# EAGLE board byteworker_nutzen (EAGLE 6.5.0), part 1 of 2
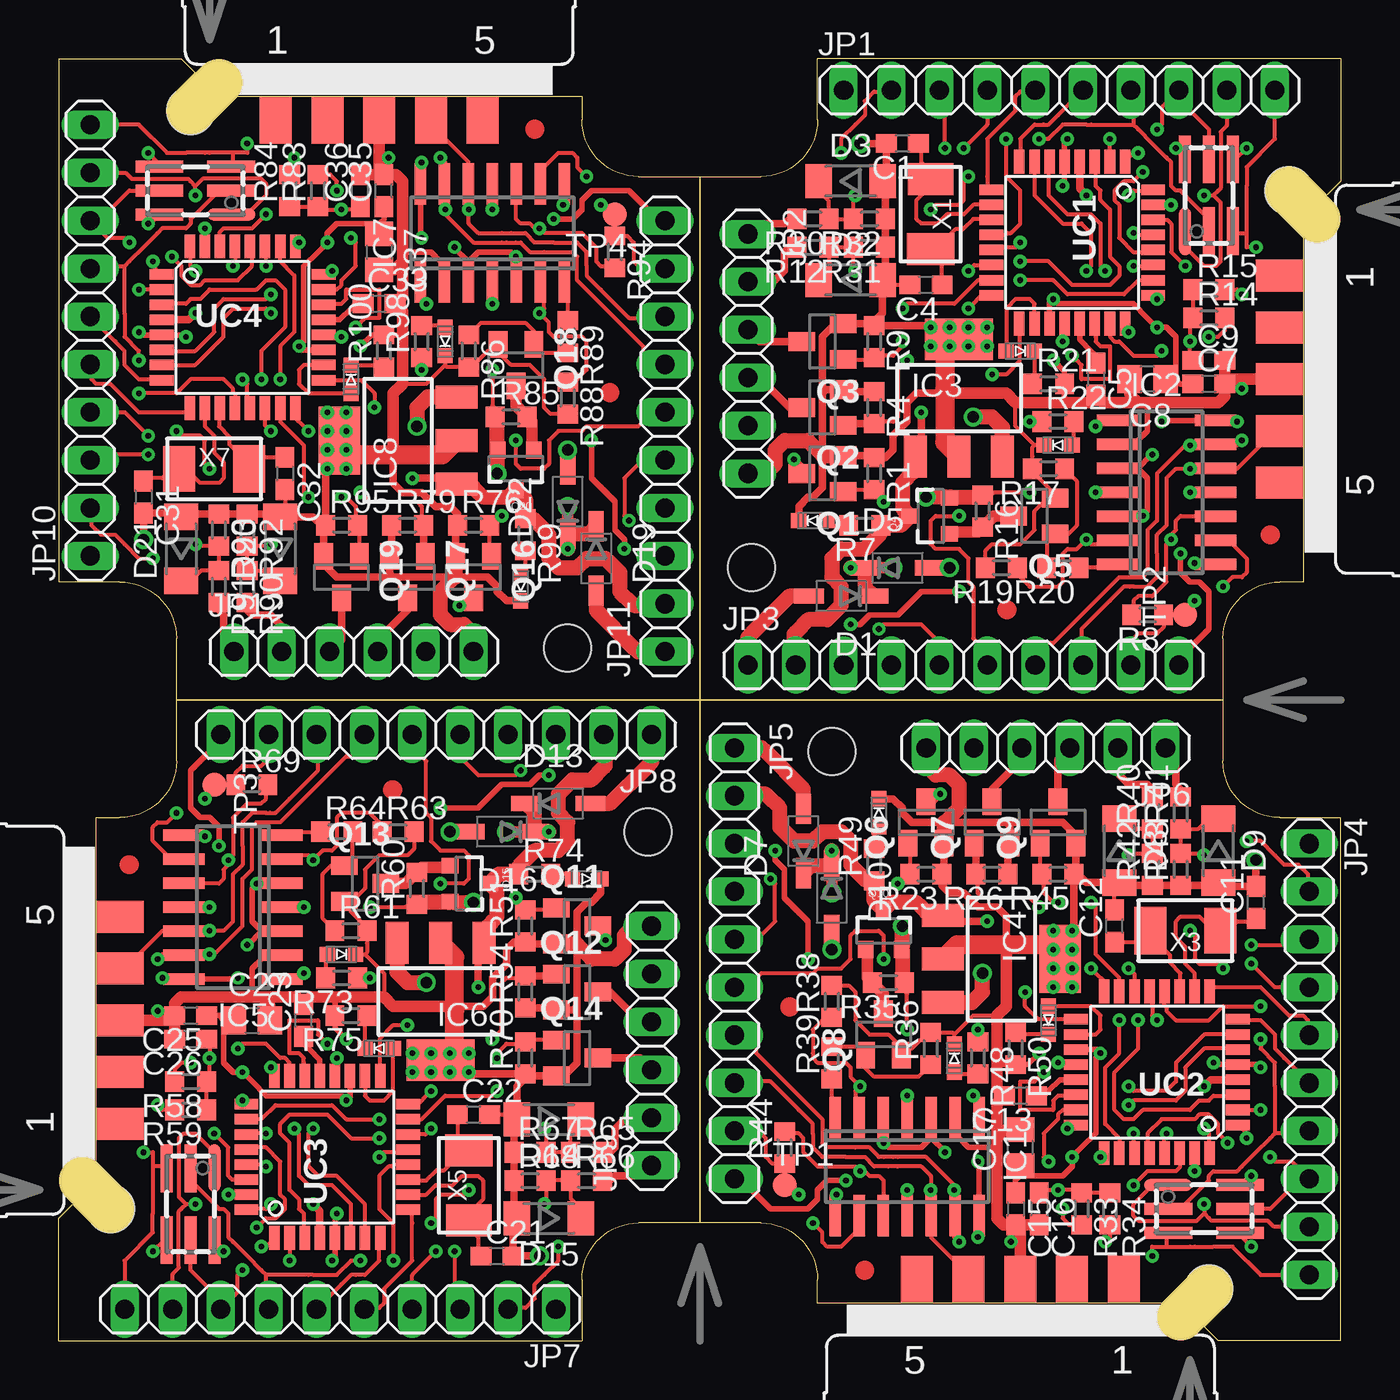
[diagram p0: board, top side]
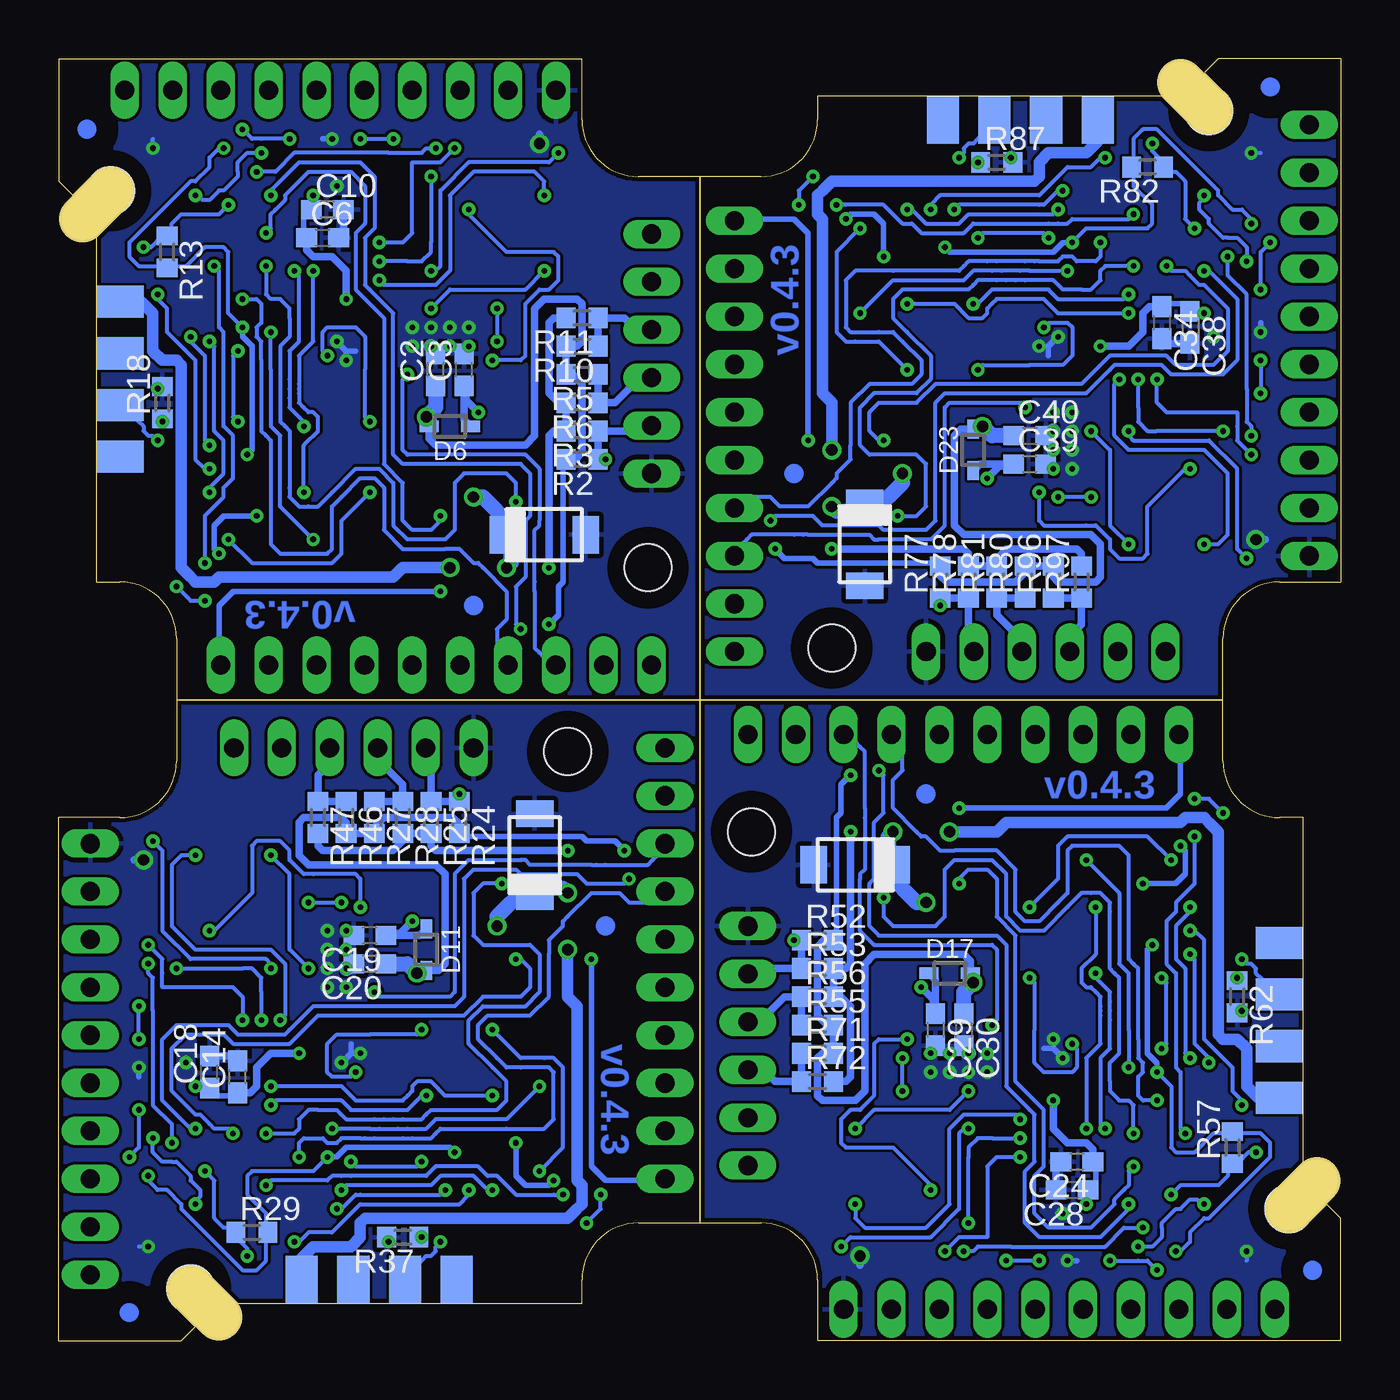
[diagram p1: board, bottom side, seen from below]

Size 68 x 68 mm. Coordinates in mm from the lower left corner, seen from the top.
Outline: 34,34 34,61.75
Outline: 61.75,34 34,34
Outline: 61.75,34 61.75,37.25 arc-90 64.75,40.25 66,40.25 66,58.5 64.25,60.25 66,62 67.25,60.75 68,61.5 68,68 40.25,68 40.25,64.75 arc-90 37.25,61.75 34,61.75
Outline: 34,34 61.75,34
Outline: 34,6.25 34,34
Outline: 34,6.25 37.25,6.25 arc-90 40.25,3.25 40.25,2 58.5,2 60.25,3.75 62,2 60.75,0.75 61.5,0 68,0 68,27.75 64.75,27.75 arc-90 61.75,30.75 61.75,34
Outline: 34,34 34,6.25
Outline: 6.25,34 34,34
Outline: 6.25,34 6.25,30.75 arc-90 3.25,27.75 2,27.75 2,9.5 3.75,7.75 2,6 0.75,7.25 0,6.5 0,0 27.75,0 27.75,3.25 arc-90 30.75,6.25 34,6.25
Outline: 34,34 6.25,34
Outline: 34,61.75 34,34
Outline: 34,61.75 30.75,61.75 arc-90 27.75,64.75 27.75,66 9.5,66 7.75,64.25 6,66 7.25,67.25 6.5,68 0,68 0,40.25 3.25,40.25 arc-90 6.25,37.25 6.25,34
Copper layers (1*16): Top 0.035mm / dielectric 1.5mm / Bottom 0.035mm
Design rules "pro-2layer-cheap": minimum track width 0.15mm, minimum drill 0.3mm, track to track 0.15mm, track to pad 0.15mm, pad to pad 0.15mm, via to via 0.15mm, smd to smd 0mil, copper to edge 0.25mm, drill to drill 0.5mm, minimum pad ring 10mil, minimum via ring 8mil, stop-mask expansion 4mil, vias tented up to drill 0.3mm, thermal gap 10mil
Holes 2.5 mm at 65.25,61 36.75,41 61,2.75 41,31.25 2.75,7 31.25,27 7,65.25 27,36.75
tRestrict: area 34.8,39 to 38.8,43; area 63.2,59 to 67.2,63; area 39,29.2 to 43,33.2; area 59,0.8 to 63,4.8; area 29.2,25 to 33.2,29; area 0.8,5 to 4.8,9; area 25,34.8 to 29,38.8; area 5,63.2 to 9,67.2
bRestrict: area 34.8,39 to 38.8,43; area 63.2,59 to 67.2,63; area 39,29.2 to 43,33.2; area 59,0.8 to 63,4.8; area 29.2,25 to 33.2,29; area 0.8,5 to 4.8,9; area 25,34.8 to 29,38.8; area 5,63.2 to 9,67.2
Milling: 4 lines

## Footprints (pad centres in the part's own frame; a part is rotated, then mirrored left to right if it is on the bottom)
C0603 = smd 1.1 x 1: 1 -0.85,0; 2 0.85,0
C0805 = smd 1.3 x 1.5: 1 -0.95,0; 2 0.95,0
SOD123 = smd 1.6 x 0.8: A 1.7,0; C -1.7,0
SOD80 = smd 1.4 x 1.8: A 1.7,0; C -1.7,0
SOD-128 = smd 2 x 1.4: A 0,-2.2; C 0,2.2
SOD323 = smd 1 x 0.6: A 1.1,0; C -1.1,0
SO14 = smd 0.6 x 2.2: 1 -3.81,-2.6; 2 -2.54,-2.6; 3 -1.27,-2.6; 4 0,-2.6; 5 1.27,-2.6; 6 2.54,-2.6; 7 3.81,-2.6; 8 3.81,2.6; 9 2.54,2.6; 10 1.27,2.6; 11 0,2.6; 12 -1.27,2.6; 13 -2.54,2.6; 14 -3.81,2.6
SOT223 = smd 1.219 x 2.235: 1 -2.311,-3.099; 2 0,-3.099; 3 2.311,-3.099 | smd 3.6 x 2.2: 4 0,3.099
2X3-1.27 = smd 0.635 x 2.54: 1 -1.27,-1.905; 2 -1.27,1.905; 3 0,-1.905; 4 0,1.905; 5 1.27,-1.905; 6 1.27,1.905
1X10 = drill 1.016 long: 1 -11.43,0; 2 -8.89,0; 3 -6.35,0; 4 -3.81,0; 5 -1.27,0; 6 1.27,0; 7 3.81,0; 8 6.35,0; 9 8.89,0; 10 11.43,0
1X06 = drill 1.016 long: 1 -6.35,0; 2 -3.81,0; 3 -1.27,0; 4 1.27,0; 5 3.81,0; 6 6.35,0
LED0603 = smd 0.8 x 0.8: A -0.75,0; C 0.75,0
SOT23C = smd 1 x 1.4: 1 -0.95,-1.1; 2 0.95,-1.1; 3 0,1.1
SOT23-3 = smd 0.8 x 0.9: 1 -0.95,-1; 2 0.95,-1; 3 0,1.1
R0603 = smd 1 x 1.1: 1 -0.85,0; 2 0.85,0
B1,27 = smd 1.27 x 1.27: TP 0,0
TQFP32-08 = smd 1.27 x 0.559: 1 -4.293,2.8; 2 -4.293,2; 3 -4.293,1.2; 4 -4.293,0.4; 5 -4.293,-0.4; 6 -4.293,-1.2; 7 -4.293,-2; 8 -4.293,-2.8; 17 4.293,-2.8; 18 4.293,-2; 19 4.293,-1.2; 20 4.293,-0.4; 21 4.293,0.4; 22 4.293,1.2; 23 4.293,2; 24 4.293,2.8 | smd 0.559 x 1.27: 9 -2.8,-4.293; 10 -2,-4.293; 11 -1.2,-4.293; 12 -0.4,-4.293; 13 0.4,-4.293; 14 1.2,-4.293; 15 2,-4.293; 16 2.8,-4.293; 25 2.8,4.293; 26 2,4.293; 27 1.2,4.293; 28 0.4,4.293; 29 -0.4,4.293; 30 -1.2,4.293; 31 -2,4.293; 32 -2.8,4.293
5.0X3.2 = smd 1.7 x 2.4: 1 -1.85,0 | smd 1.7 x 2.5: 2 1.85,0
SUBD9 = smd 1.7 x 2.5: 1 -5.486,-5.5; 2 -2.743,-5.5; 3 0,-5.5; 4 2.743,-5.5; 5 5.486,-5.5 | smd 1.7 x 2.5 bottom: 6 -4.115,-5.5; 7 -1.372,-5.5; 8 1.372,-5.5; 9 4.115,-5.5

## Placement (x,y rotation side)
C1  18p  [C0603]  44.75,63.5 180 top
C2  100n  [C0603]  48,51.5 90 bottom
C3  330n  [C0603]  46.5,51.5 90 bottom
C4  18p  [C0603]  46,56 180 top
C5  100n  [C0603]  55,51 270 top
C6  100n  [C0603]  54,58.5 0 bottom
C7  100n  [C0603]  61,50.75 0 top
C8  2u2  [C0805]  57.75,51 180 top
C9  n.b.[100n]  [C0603]  61,52 0 top
C10  100n  [C0603]  53.75,60 0 bottom
C11  18p  [C0603]  63.5,23.25 90 top
C12  18p  [C0603]  56,22 90 top
C13  100n  [C0603]  51,13 180 top
C14  100n  [C0603]  58.5,14 90 bottom
C15  100n  [C0603]  50.75,7 270 top
C16  n.b.[100n]  [C0603]  52,7 270 top
C17  2u2  [C0805]  51,10.25 90 top
C18  100n  [C0603]  60,14.25 90 bottom
C19  330n  [C0603]  51.5,21.5 180 bottom
C20  100n  [C0603]  51.5,20 180 bottom
C21  18p  [C0603]  23.25,4.5 0 top
C22  18p  [C0603]  22,12 0 top
C23  100n  [C0603]  13,17 90 top
C24  100n  [C0603]  14,9.5 180 bottom
C25  100n  [C0603]  7,17.25 180 top
C26  n.b.[100n]  [C0603]  7,16 180 top
C27  2u2  [C0805]  10.25,17 0 top
C28  100n  [C0603]  14.25,8 180 bottom
C29  330n  [C0603]  21.5,16.5 270 bottom
C30  100n  [C0603]  20,16.5 270 bottom
C31  18p  [C0603]  4.5,44.75 270 top
C32  18p  [C0603]  12,46 270 top
C33  100n  [C0603]  17,55 0 top
C34  100n  [C0603]  9.5,54 270 bottom
C35  100n  [C0603]  17.25,61 90 top
C36  n.b.[100n]  [C0603]  16,61 90 top
C37  2u2  [C0805]  17,57.75 270 top
C38  100n  [C0603]  8,53.75 270 bottom
C39  330n  [C0603]  16.5,46.5 0 bottom
C40  100n  [C0603]  16.5,48 0 bottom
D1  1N5819HW  [SOD123]  41.5,39.5 180 top
D2  4v7  [SOD80]  42,56.25 0 top
D3  4v7  [SOD80]  42,61.5 0 top
D4  16V  [SOD-128]  42.25,42.75 90 bottom
D5  1N5819HW  [SOD123]  44.5,41 0 top
D6  SCHOTTKY323  [SOD323]  47.25,48.5 180 bottom
D7  1N5819HW  [SOD123]  39.5,26.5 90 top
D8  4v7  [SOD80]  56.25,26 270 top
D9  4v7  [SOD80]  61.5,26 270 top
D10  1N5819HW  [SOD123]  41,23.5 270 top
D11  SCHOTTKY323  [SOD323]  48.5,20.75 270 bottom
D12  16V  [SOD-128]  42.75,25.75 180 bottom
D13  1N5819HW  [SOD123]  26.5,28.5 0 top
D14  4v7  [SOD80]  26,11.75 180 top
D15  4v7  [SOD80]  26,6.5 180 top
D16  1N5819HW  [SOD123]  23.5,27 180 top
D17  SCHOTTKY323  [SOD323]  20.75,19.5 0 bottom
D18  16V  [SOD-128]  25.75,25.25 270 bottom
D19  1N5819HW  [SOD123]  28.5,41.5 270 top
D20  4v7  [SOD80]  11.75,42 90 top
D21  4v7  [SOD80]  6.5,42 90 top
D22  1N5819HW  [SOD123]  27,44.5 90 top
D23  SCHOTTKY323  [SOD323]  19.5,47.25 90 bottom
D24  16V  [SOD-128]  25.25,42.25 0 bottom
E$1  [MILL-MARKER]  69,60 0 top
E$2  [MILL-MARKER]  60,-1 270 top
E$3  [MILL-MARKER]  -1,8 180 top
E$4  [MILL-MARKER]  8,69 90 top
E$5  [SCRATCH-MARKER]  63,34 0 top
E$6  [SCRATCH-MARKER]  34,5 270 top
IC1  TJA1043  [SO14]  45,9.25 180 top
IC2  TJA1043  [SO14]  58.75,45 270 top
IC3  UA78M05IDCY  [SOT223]  47.75,50 0 top
IC4  UA78M05IDCY  [SOT223]  50,20.25 270 top
IC5  TJA1043  [SO14]  9.25,23 90 top
IC6  UA78M05IDCY  [SOT223]  20.25,18 180 top
IC7  TJA1043  [SO14]  23,58.75 0 top
IC8  UA78M05IDCY  [SOT223]  18,47.75 90 top
J1  AVRSPI-61.27  [2X3-1.27]  60.75,7 270 top
J2  AVRSPI-61.27  [2X3-1.27]  61,60.75 0 top
J3  AVRSPI-61.27  [2X3-1.27]  7,7.25 180 top
J4  AVRSPI-61.27  [2X3-1.27]  7.25,61 90 top
JP1  [1X10]  53.06,66.33 0 top
JP2  [1X06]  36.55,52.36 270 top
JP3  [1X10]  47.98,35.84 0 top
JP4  [1X10]  66.33,14.94 270 top
JP5  [1X10]  35.84,20.02 270 top
JP6  [1X06]  52.36,31.45 180 top
JP7  [1X10]  14.94,1.67 180 top
JP8  [1X10]  20.02,32.16 180 top
JP9  [1X06]  31.45,15.64 90 top
JP10  [1X10]  1.67,53.06 90 top
JP11  [1X10]  32.16,47.98 90 top
JP12  [1X06]  15.64,36.55 0 top
LED1  red  [LED0603]  51,52.5 0 top
LED2  blue  [LED0603]  53,47.5 180 top
LED3  red  [LED0603]  40,43.5 180 top
LED4  blue  [LED0603]  47.5,15 90 top
LED5  red  [LED0603]  43.5,28 90 top
LED6  red  [LED0603]  52.5,17 270 top
LED7  blue  [LED0603]  15,20.5 0 top
LED8  red  [LED0603]  28,24.5 0 top
LED9  red  [LED0603]  17,15.5 180 top
LED10  blue  [LED0603]  20.5,53 270 top
LED11  red  [LED0603]  24.5,40 270 top
LED12  red  [LED0603]  15.5,51 90 top
Q1  BSS138  [SOT23C]  40.5,46 90 top
Q2  BSS138  [SOT23C]  40.5,49.5 90 top
Q3  BSS138  [SOT23C]  40.5,53 90 top
Q4  AP2321GN-HF-3TR  [SOT23-3]  46.25,43.75 90 top
Q5  BSS138  [SOT23C]  51.75,43.75 90 top
Q6  BSS138  [SOT23C]  46,27.5 0 top
Q7  BSS138  [SOT23C]  49.5,27.5 0 top
Q8  BSS138  [SOT23C]  43.75,16.25 0 top
Q9  BSS138  [SOT23C]  53,27.5 0 top
Q10  AP2321GN-HF-3TR  [SOT23-3]  43.75,21.75 0 top
Q11  BSS138  [SOT23C]  27.5,22 270 top
Q12  BSS138  [SOT23C]  27.5,18.5 270 top
Q13  BSS138  [SOT23C]  16.25,24.25 270 top
Q14  BSS138  [SOT23C]  27.5,15 270 top
Q15  AP2321GN-HF-3TR  [SOT23-3]  21.75,24.25 270 top
Q16  BSS138  [SOT23C]  22,40.5 180 top
Q17  BSS138  [SOT23C]  18.5,40.5 180 top
Q18  BSS138  [SOT23C]  24.25,51.75 180 top
Q19  BSS138  [SOT23C]  15,40.5 180 top
Q20  AP2321GN-HF-3TR  [SOT23-3]  24.25,46.25 180 top
R1  10k  [R0603]  43.25,46 270 top
R2  1k  [R0603]  40.25,46.75 180 bottom
R3  dnp  [R0603]  40.25,48.25 180 bottom
R4  10k  [R0603]  43.25,49.5 270 top
R5  1k  [R0603]  40.25,51.25 180 bottom
R6  dnp  [R0603]  40.25,49.75 180 bottom
R7  1k  [R0603]  42.75,43.25 180 top
R8  10k  [R0603]  57.75,38.5 180 top
R9  10k  [R0603]  43.25,53 270 top
R10  1k  [R0603]  40.25,52.75 180 bottom
R11  dnp  [R0603]  40.25,54.25 180 bottom
R12  18k  [R0603]  40,58 180 top
R13  10k  [R0603]  62.25,57.75 270 bottom
R14  n.b.[62R]  [R0603]  61,54.25 0 top
R15  n.b.[62R]  [R0603]  61,55.75 0 top
R16  10k  [R0603]  49,44 270 top
R17  10k  [R0603]  52.5,46.25 180 top
R18  10k  [R0603]  62.5,49.75 90 bottom
R19  10k  [R0603]  50,41 180 top
R20  10k  [R0603]  53.25,41 180 top
R21  1k  [R0603]  52.5,50.75 0 top
R22  1k  [R0603]  53,48.75 0 top
R23  10k  [R0603]  46,24.75 180 top
R24  1k  [R0603]  46.75,27.75 270 bottom
R25  dnp  [R0603]  48.25,27.75 270 bottom
R26  10k  [R0603]  49.5,24.75 180 top
R27  1k  [R0603]  51.25,27.75 270 bottom
R28  dnp  [R0603]  49.75,27.75 270 bottom
R29  10k  [R0603]  57.75,5.75 0 bottom
R30  18k  [R0603]  40,59.5 180 top
R31  10k  [R0603]  43,58 180 top
R32  10k  [R0603]  43,59.5 180 top
R33  n.b.[62R]  [R0603]  54.25,7 270 top
R34  n.b.[62R]  [R0603]  55.75,7 270 top
R35  10k  [R0603]  44,19 180 top
R36  10k  [R0603]  46.25,15.5 90 top
R37  10k  [R0603]  49.75,5.5 180 bottom
R38  10k  [R0603]  41,18 90 top
R39  10k  [R0603]  41,14.75 90 top
R40  18k  [R0603]  58,28 90 top
R41  18k  [R0603]  59.5,28 90 top
R42  10k  [R0603]  58,25 90 top
R43  10k  [R0603]  59.5,25 90 top
R44  10k  [R0603]  38.5,10.25 90 top
R45  10k  [R0603]  53,24.75 180 top
R46  1k  [R0603]  52.75,27.75 270 bottom
R47  dnp  [R0603]  54.25,27.75 270 bottom
R48  1k  [R0603]  48.75,15 270 top
R49  1k  [R0603]  43.25,25.25 90 top
R50  1k  [R0603]  50.75,15.5 270 top
R51  10k  [R0603]  24.75,22 90 top
R52  1k  [R0603]  27.75,21.25 0 bottom
R53  dnp  [R0603]  27.75,19.75 0 bottom
R54  10k  [R0603]  24.75,18.5 90 top
R55  1k  [R0603]  27.75,16.75 0 bottom
R56  dnp  [R0603]  27.75,18.25 0 bottom
R57  10k  [R0603]  5.75,10.25 90 bottom
R58  n.b.[62R]  [R0603]  7,13.75 180 top
R59  n.b.[62R]  [R0603]  7,12.25 180 top
R60  10k  [R0603]  19,24 90 top
R61  10k  [R0603]  15.5,21.75 0 top
R62  10k  [R0603]  5.5,18.25 270 bottom
R63  10k  [R0603]  18,27 0 top
R64  10k  [R0603]  14.75,27 0 top
R65  18k  [R0603]  28,10 0 top
R66  18k  [R0603]  28,8.5 0 top
R67  10k  [R0603]  25,10 0 top
R68  10k  [R0603]  25,8.5 0 top
R69  10k  [R0603]  10.25,29.5 0 top
R70  10k  [R0603]  24.75,15 90 top
R71  1k  [R0603]  27.75,15.25 0 bottom
R72  dnp  [R0603]  27.75,13.75 0 bottom
R73  1k  [R0603]  15,19.25 180 top
R74  1k  [R0603]  25.25,24.75 0 top
R75  1k  [R0603]  15.5,17.25 180 top
R76  10k  [R0603]  22,43.25 0 top
R77  1k  [R0603]  21.25,40.25 90 bottom
R78  dnp  [R0603]  19.75,40.25 90 bottom
R79  10k  [R0603]  18.5,43.25 0 top
R80  1k  [R0603]  16.75,40.25 90 bottom
R81  dnp  [R0603]  18.25,40.25 90 bottom
R82  10k  [R0603]  10.25,62.25 180 bottom
R83  n.b.[62R]  [R0603]  13.75,61 90 top
R84  n.b.[62R]  [R0603]  12.25,61 90 top
R85  10k  [R0603]  24,49 0 top
R86  10k  [R0603]  21.75,52.5 270 top
R87  10k  [R0603]  18.25,62.5 0 bottom
R88  10k  [R0603]  27,50 270 top
R89  10k  [R0603]  27,53.25 270 top
R90  18k  [R0603]  10,40 270 top
R91  18k  [R0603]  8.5,40 270 top
R92  10k  [R0603]  10,43 270 top
R93  10k  [R0603]  8.5,43 270 top
R94  10k  [R0603]  29.5,57.75 270 top
R95  10k  [R0603]  15,43.25 0 top
R96  1k  [R0603]  15.25,40.25 90 bottom
R97  dnp  [R0603]  13.75,40.25 90 bottom
R98  1k  [R0603]  19.25,53 90 top
R99  1k  [R0603]  24.75,42.75 270 top
R100  1k  [R0603]  17.25,52.5 90 top
TP1  PTR1B1,27  [B1,27]  38.5,8.25 0 top
TP2  PTR1B1,27  [B1,27]  59.75,38.5 90 top
TP3  PTR1B1,27  [B1,27]  8.25,29.5 270 top
TP4  PTR1B1,27  [B1,27]  29.5,59.75 180 top
U$1  [FIDUCIAL_R]  38.77,17.71 180 top
U$2  [FIDUCIAL_R]  50.29,38.77 270 top
U$3  [FIDUCIAL_R]  39,22 180 bottom
U$4  [FIDUCIAL_R]  46,39 90 bottom
U$5  [FIDUCIAL_R]  64.25,42.75 270 top
U$6  [FIDUCIAL_R]  66.5,64.25 90 bottom
U$7  [FIDUCIAL_R]  42.75,3.75 180 top
U$8  [FIDUCIAL_R]  64.25,1.5 180 bottom
U$9  [FIDUCIAL_R]  17.71,29.23 90 top
U$10  [FIDUCIAL_R]  22,29 270 bottom
U$11  [FIDUCIAL_R]  3.75,25.25 90 top
U$12  [FIDUCIAL_R]  1.5,3.75 270 bottom
U$13  [FIDUCIAL_R]  29.23,50.29 0 top
U$14  [FIDUCIAL_R]  29,46 0 bottom
U$15  [FIDUCIAL_R]  25.25,64.25 0 top
U$16  [FIDUCIAL_R]  3.75,66.5 0 bottom
UC1  ATMEGA16M1  [TQFP32-08]  53.75,58.25 270 top
UC2  ATMEGA16M1  [TQFP32-08]  58.25,14.25 180 top
UC3  ATMEGA16M1  [TQFP32-08]  14.25,9.75 90 top
UC4  ATMEGA16M1  [TQFP32-08]  9.75,53.75 0 top
X1  16 MHz  [5.0X3.2]  46.25,59.75 270 top
X2  SUBD-M_H9  [SUBD9]  70.25,51 270 top
X3  16 MHz  [5.0X3.2]  59.75,21.75 180 top
X4  SUBD-M_H9  [SUBD9]  51,-2.25 180 top
X5  16 MHz  [5.0X3.2]  21.75,8.25 90 top
X6  SUBD-M_H9  [SUBD9]  -2.25,17 90 top
X7  16 MHz  [5.0X3.2]  8.25,46.25 0 top
X8  SUBD-M_H9  [SUBD9]  17,70.25 0 top

## Library data of the parts
C1-C40 D1-D3 D5-D11 D13-D17 D19-D23 R7 R8 R13-R22 R29 R33-R39 R44 R48-R50 R57-R64 R69 R73-R75 R82-R89 R94 R98-R100 = bytewerk-passive
D4 D12 D18 D24 = bytewerk-diode; MF: NXP; MPN: PTVS18VP1UP; OC_FARNELL: 1859877
E$1-E$6 U$1-U$16 = bytewerk-symbol
IC1 IC2 IC5 IC7 = bytewerk-network; MF: NXP; MPN: TJA1043T,118; OC_MOUSER: 771-TJA1043T118
IC3 IC4 IC6 IC8 = bytewerk-vreg; MF: TEXAS INSTRUMENTS; MPN: UA78M05IDCY; OC_FARNELL: 1494947
J1-J4 X2 X4 X6 X8 = bytewerk-con
JP1-JP12 = pinhead
LED1-LED12 = bytewerk-led
Q1-Q3 Q5-Q9 Q11-Q14 Q16-Q19 = bytewerk-fet; MF: Fairchild Semiconductor; MPN: BSS138; OC_MOUSER: 512-BSS138
Q4 Q10 Q15 Q20 = bytewerk-transistor; MF: ADVANCED POWER ELECTRONICS CORP; MPN: AP2321GN-HF-3TR; OC_FARNELL: 2319601
R1-R6 R9-R12 R23-R28 R30-R32 R40-R43 R45-R47 R51-R56 R65-R68 R70-R72 R76-R81 R90-R93 R95-R97 = bytewerk-rcl
TP1-TP4 = testpad
UC1-UC4 = bytewerk-uc
X1 X3 X5 X7 = bytewerk-crystal

## Nets
!CAN_ERR!: IC2.8 UC1.30
!CAN_ERR!1: IC1.8 UC2.30
!CAN_ERR!2: IC5.8 UC3.30
!CAN_ERR!3: IC7.8 UC4.30
!CAN_STB!: IC2.14 R18.1 UC1.23
!CAN_STB!1: IC1.14 R37.1 UC2.23
!CAN_STB!2: IC5.14 R62.1 UC3.23
!CAN_STB!3: IC7.14 R87.1 UC4.23
!RESET!: J2.5 JP1.10 R13.1 UC1.31
!RESET!1: J1.5 JP4.10 R29.1 UC2.31
!RESET!2: J3.5 JP7.10 R57.1 UC3.31
!RESET!3: J4.5 JP10.10 R82.1 UC4.31
+5V: C2.1 C6.1 C7.1 C8.1 C10.1 D6.A IC2.3 IC2.5 IC3.3 J2.2 JP3.10 R2.2 R5.2 R10.2 R13.2 UC1.4 UC1.19
+5V1: C14.1 C15.1 C17.1 C18.1 C20.1 D11.A IC1.3 IC1.5 IC4.3 J1.2 JP5.10 R24.2 R27.2 R29.2 R46.2 UC2.4 UC2.19
+5V2: C24.1 C25.1 C27.1 C28.1 C30.1 D17.A IC5.3 IC5.5 IC6.3 J3.2 JP8.10 R52.2 R55.2 R57.2 R71.2 UC3.4 UC3.19
+5V3: C34.1 C35.1 C37.1 C38.1 C40.1 D23.A IC7.3 IC7.5 IC8.3 J4.2 JP11.10 R77.2 R80.2 R82.2 R96.2 UC4.4 UC4.19
AREF: C5.1 UC1.21
AREF1: C13.1 UC2.21
AREF2: C23.1 UC3.21
AREF3: C33.1 UC4.21
CAN_EN: IC2.6 R19.1 UC1.24
CAN_EN1: IC1.6 R38.1 UC2.24
CAN_EN2: IC5.6 R63.1 UC3.24
CAN_EN3: IC7.6 R88.1 UC4.24
CAN_RX: IC2.4 UC1.7
CAN_RX1: IC1.4 UC2.7
CAN_RX2: IC5.4 UC3.7
CAN_RX3: IC7.4 UC4.7
CAN_TX: IC2.1 UC1.6
CAN_TX1: IC1.1 UC2.6
CAN_TX2: IC5.1 UC3.6
CAN_TX3: IC7.1 UC4.6
CANH: IC2.13 JP3.7 R14.2 X2.8
CANH1: IC1.13 JP5.7 R33.2 X4.8
CANH2: IC5.13 JP8.7 R58.2 X6.8
CANH3: IC7.13 JP11.7 R83.2 X8.8
CANL: IC2.12 JP3.8 R15.2 X2.4
CANL1: IC1.12 JP5.8 R34.2 X4.4
CANL2: IC5.12 JP8.8 R59.2 X6.4
CANL3: IC7.12 JP11.8 R84.2 X8.4
D2A: JP3.4 UC1.25
D2A1: JP5.4 UC2.25
D2A2: JP8.4 UC3.25
D2A3: JP11.4 UC4.25
GND: C1.2 C2.2 C3.2 C4.2 C5.2 C6.2 C7.2 C8.2 C9.2 C10.2 D2.A D3.A D4.A IC2.2 IC3.2 IC3.4 J2.6 JP1.1 JP2.6 LED2.C LED3.C Q1.2 Q2.2 Q3.2 Q5.2 R1.1 R4.1 R9.1 R17.2 R18.2 R19.2 R21.2 R31.1 R32.1 UC1.5 UC1.20 X2.3
GND1: C11.2 C12.2 C13.2 C14.2 C15.2 C16.2 C17.2 C18.2 C19.2 C20.2 D8.A D9.A D12.A IC1.2 IC4.2 IC4.4 J1.6 JP4.1 JP6.6 LED4.C LED5.C Q6.2 Q7.2 Q8.2 Q9.2 R23.1 R26.1 R36.2 R37.2 R38.2 R42.1 R43.1 R45.1 R50.2 UC2.5 UC2.20 X4.3
GND2: C21.2 C22.2 C23.2 C24.2 C25.2 C26.2 C27.2 C28.2 C29.2 C30.2 D14.A D15.A D18.A IC5.2 IC6.2 IC6.4 J3.6 JP7.1 JP9.6 LED7.C LED8.C Q11.2 Q12.2 Q13.2 Q14.2 R51.1 R54.1 R61.2 R62.2 R63.2 R67.1 R68.1 R70.1 R75.2 UC3.5 UC3.20 X6.3
GND3: C31.2 C32.2 C33.2 C34.2 C35.2 C36.2 C37.2 C38.2 C39.2 C40.2 D20.A D21.A D24.A IC7.2 IC8.2 IC8.4 J4.6 JP10.1 JP12.6 LED10.C LED11.C Q16.2 Q17.2 Q18.2 Q19.2 R76.1 R79.1 R86.2 R87.2 R88.2 R92.1 R93.1 R95.1 R100.2 UC4.5 UC4.20 X8.3
IN0: JP2.2 R12.2
IN1: JP2.1 R30.2
IN2: JP6.1 R41.2
IN3: JP6.2 R40.2
IN4: JP9.1 R66.2
IN5: JP9.2 R65.2
IN6: JP12.1 R91.2
IN7: JP12.2 R90.2
INH: Q5.1 R17.1 R20.2
INH1: Q8.1 R36.1 R39.2
INH2: Q13.1 R61.1 R64.2
INH3: Q18.1 R86.1 R89.2
MISO_A/OC1A: J2.1 JP1.9 UC1.1
MISO_A/OC1A1: J1.1 JP4.9 UC2.1
MISO_A/OC1A2: J3.1 JP7.9 UC3.1
MISO_A/OC1A3: J4.1 JP10.9 UC4.1
N$1: C1.1 UC1.10 X1.1
N$2: C4.1 UC1.11 X1.2
N$3: LED2.A R22.2
N$4: C9.1 IC2.11 R14.1 R15.1
N$5: IC2.7 R20.1
N$6: Q4.1 Q5.3 R16.2
N$7: LED1.A UC1.18
N$8: LED3.A R7.2
N$9: LED1.C R21.1
N$10: C11.1 UC2.10 X3.1
N$11: C12.1 UC2.11 X3.2
N$12: Q8.3 Q10.1 R35.2
N$13: C16.1 IC1.11 R33.1 R34.1
N$14: IC1.7 R39.1
N$15: LED4.A R48.2
N$16: LED5.A R49.2
N$17: LED6.A UC2.18
N$18: LED6.C R50.1
N$19: C21.1 UC3.10 X5.1
N$20: C22.1 UC3.11 X5.2
N$21: Q13.3 Q15.1 R60.2
N$22: C26.1 IC5.11 R58.1 R59.1
N$23: IC5.7 R64.1
N$24: LED7.A R73.2
N$25: LED8.A R74.2
N$26: LED9.A UC3.18
N$27: LED9.C R75.1
N$28: C31.1 UC4.10 X7.1
N$29: C32.1 UC4.11 X7.2
N$30: Q18.3 Q20.1 R85.2
N$31: C36.1 IC7.11 R83.1 R84.1
N$32: IC7.7 R89.1
N$33: LED10.A R98.2
N$34: LED11.A R99.2
N$35: LED12.A UC4.18
N$36: LED12.C R100.1
OUT0: JP2.5 Q1.3 R2.1 R3.1
OUT1: JP2.4 Q2.3 R5.1 R6.1
OUT2: JP2.3 Q3.3 R10.1 R11.1
OUT3: JP6.4 Q7.3 R27.1 R28.1
OUT4: JP6.5 Q6.3 R24.1 R25.1
OUT5: JP6.3 Q9.3 R46.1 R47.1
OUT6: JP9.4 Q12.3 R55.1 R56.1
OUT7: JP9.5 Q11.3 R52.1 R53.1
OUT8: JP9.3 Q14.3 R71.1 R72.1
OUT9: JP12.4 Q17.3 R80.1 R81.1
OUT10: JP12.5 Q16.3 R77.1 R78.1
OUT11: JP12.3 Q19.3 R96.1 R97.1
PB0/MISO: JP1.6 UC1.8
PB0/MISO1: JP4.6 UC2.8
PB0/MISO2: JP7.6 UC3.8
PB0/MISO3: JP10.6 UC4.8
PB1: Q6.1 R23.2 UC2.27
PB1/MOSI: JP1.5 UC1.9
PB1/MOSI1: JP4.5 UC2.9
PB1/MOSI2: JP7.5 UC3.9
PB1/MOSI3: JP10.5 UC4.9
PB2: Q11.1 R51.2 UC3.27
PB3: Q16.1 R76.2 UC4.27
PB6: Q1.1 R1.2 UC1.27
PB7/SCK: JP1.4 UC1.28
PB7/SCK1: JP4.4 UC2.28
PB7/SCK2: JP7.4 UC3.28
PB7/SCK3: JP10.4 UC4.28
PC1: JP5.3 UC2.17
PC2: JP8.3 UC3.17
PC3: JP11.3 UC4.17
PC4: JP3.3 UC1.17
PD0: JP3.6 UC1.29
PD1: JP3.5 UC1.32
PD2: Q9.1 R45.2 UC2.15
PD3: JP5.5 UC2.32
PD4: JP5.6 UC2.29
PD5: Q14.1 R70.2 UC3.15
PD5/ADC1: JP4.3 UC2.13
PD5/ADC2: JP1.3 UC1.13
PD5/ADC3: JP7.3 UC3.13
PD5/ADC4: JP10.3 UC4.13
PD6: JP8.5 UC3.32
PD6/ADC1: JP4.2 UC2.14
PD6/ADC2: JP7.2 UC3.14
PD6/ADC3: JP1.2 UC1.14
PD6/ADC4: JP10.2 UC4.14
PD7: Q3.1 R9.2 UC1.15
PD8: JP8.6 UC3.29
PD9: Q19.1 R95.2 UC4.15
PD10: JP11.5 UC4.32
PD11: JP11.6 UC4.29
RXD/SCK_A: J2.3 JP1.7 UC1.12
RXD/SCK_A1: J1.3 JP4.7 UC2.12
RXD/SCK_A2: J3.3 JP7.7 UC3.12
RXD/SCK_A3: J4.3 JP10.7 UC4.12
SS_A/OC1B: Q2.1 R4.2 UC1.3
SS_A/OC1B1: Q7.1 R26.2 UC2.3
SS_A/OC1B2: Q12.1 R54.2 UC3.3
SS_A/OC1B3: Q17.1 R79.2 UC4.3
TESTLED1: R48.1 UC2.22
TESTLED2: R22.1 UC1.22
TESTLED3: R73.1 UC3.22
TESTLED4: R98.1 UC4.22
TXD/MOSI_A/OC0A/SS: J2.4 JP1.8 UC1.2
TXD/MOSI_A/OC0A/SS1: J1.4 JP4.8 UC2.2
TXD/MOSI_A/OC0A/SS2: J3.4 JP7.8 UC3.2
TXD/MOSI_A/OC0A/SS3: J4.4 JP10.8 UC4.2
UC_IN0: D2.C R12.1 R31.2 UC1.16
UC_IN1: D3.C R30.1 R32.2 UC1.26
UC_IN2: D8.C R40.1 R42.2 UC2.16
UC_IN3: D9.C R41.1 R43.2 UC2.26
UC_IN4: D14.C R65.1 R67.2 UC3.16
UC_IN5: D15.C R66.1 R68.2 UC3.26
UC_IN6: D20.C R90.1 R92.2 UC4.16
UC_IN7: D21.C R91.1 R93.2 UC4.26
VIN_BUS: D5.A X2.6
VIN_BUS1: D10.A X4.6
VIN_BUS2: D16.A X6.6
VIN_BUS3: D22.A X8.6
VIN_EXT: D1.A JP3.1
VIN_EXT1: D7.A JP5.1
VIN_EXT2: D13.A JP8.1
VIN_EXT3: D19.A JP11.1
VIN_RECT: D1.C D4.C D5.C IC2.10 Q4.2 R3.2 R6.2 R8.2 R11.2 R16.1
VIN_RECT1: D7.C D10.C D12.C IC1.10 Q10.2 R25.2 R28.2 R35.1 R44.2 R47.2
VIN_RECT2: D13.C D16.C D18.C IC5.10 Q15.2 R53.2 R56.2 R60.1 R69.2 R72.2
VIN_RECT3: D19.C D22.C D24.C IC7.10 Q20.2 R78.2 R81.2 R85.1 R94.2 R97.2
VOUT_SW: C3.1 D6.C IC3.1 JP3.2 Q4.3 R7.1
VOUT_SW1: C19.1 D11.C IC4.1 JP5.2 Q10.3 R49.1
VOUT_SW2: C29.1 D17.C IC6.1 JP8.2 Q15.3 R74.1
VOUT_SW3: C39.1 D23.C IC8.1 JP11.2 Q20.3 R99.1
WAKE: IC2.9 JP3.9 R8.1 TP2.TP
WAKE1: IC1.9 JP5.9 R44.1 TP1.TP
WAKE2: IC5.9 JP8.9 R69.1 TP3.TP
WAKE3: IC7.9 JP11.9 R94.1 TP4.TP

## Tracks (layer width: path | path; a pad name or v marks a point on that pad's centre or on a via)
!CAN_ERR!  (via drill 0.3)
  Top 0.2: IC2.8 60.31,41.19 v60.25,41.25 | UC1.30 58.8,59.45 59,59.25 59,57.75 v59.75,57
  Bottom 0.2: v60.25,41.25 60.25,41.75 60.25,43.75 59.25,44.75 59.25,45.25 58.75,45.75 58.75,48 59.25,48.5 59.25,52.5 59.25,53 59.25,53.5 59.5,53.75 59.5,56.75 v59.75,57
!CAN_ERR!1  (via drill 0.3)
  Top 0.2: IC1.8 41.19,7.69 v41.25,7.75 | UC2.30 59.45,9.2 59.25,9 57.75,9 v57,8.25
  Bottom 0.2: v41.25,7.75 41.75,7.75 43.75,7.75 44.75,8.75 45.25,8.75 45.75,9.25 48,9.25 48.5,8.75 52.5,8.75 53,8.75 53.5,8.75 53.75,8.5 56.75,8.5 v57,8.25
!CAN_ERR!2  (via drill 0.3)
  Top 0.2: IC5.8 7.69,26.81 v7.75,26.75 | UC3.30 9.2,8.55 9,8.75 9,10.25 v8.25,11
  Bottom 0.2: v7.75,26.75 7.75,26.25 7.75,24.25 8.75,23.25 8.75,22.75 9.25,22.25 9.25,20 8.75,19.5 8.75,15.5 8.75,15 8.75,14.5 8.5,14.25 8.5,11.25 v8.25,11
!CAN_ERR!3  (via drill 0.3)
  Top 0.2: IC7.8 26.81,60.31 v26.75,60.25 | UC4.30 8.55,58.8 8.75,59 10.25,59 v11,59.75
  Bottom 0.2: v26.75,60.25 26.25,60.25 24.25,60.25 23.25,59.25 22.75,59.25 22.25,58.75 20,58.75 19.5,59.25 15.5,59.25 15,59.25 14.5,59.25 14.25,59.5 11.25,59.5 v11,59.75
!CAN_STB!  (via drill 0.3)
  Top 0.15: IC2.14 62.44,48.81 v62.5,48.75
  Top 0.2: UC1.23 55.75,53.25 56,53 56.25,53 56.5,52.75 57,52.25 58.25,52.25 v58.5,52.5
  Top 0.3: v58.5,48.75 58.56,48.81 IC2.14
  Bottom 0.15: v62.5,48.75 R18.1
  Bottom 0.2: v58.5,48.75 58.75,49 58.75,52.25 v58.5,52.5
!CAN_STB!1  (via drill 0.3)
  Top 0.15: IC1.14 48.81,5.56 v48.75,5.5
  Top 0.2: UC2.23 53.25,12.25 53,12 53,11.75 52.75,11.5 52.25,11 52.25,9.75 v52.5,9.5
  Top 0.3: v48.75,9.5 48.81,9.44 IC1.14
  Bottom 0.15: v48.75,5.5 R37.1
  Bottom 0.2: v48.75,9.5 49,9.25 52.25,9.25 v52.5,9.5
!CAN_STB!2  (via drill 0.3)
  Top 0.15: IC5.14 5.56,19.19 v5.5,19.25
  Top 0.2: UC3.23 12.25,14.75 12,15 11.75,15 11.5,15.25 11,15.75 9.75,15.75 v9.5,15.5
  Top 0.3: v9.5,19.25 9.44,19.19 IC5.14
  Bottom 0.15: v5.5,19.25 R62.1
  Bottom 0.2: v9.5,19.25 9.25,19 9.25,15.75 v9.5,15.5
!CAN_STB!3  (via drill 0.3)
  Top 0.15: IC7.14 19.19,62.44 v19.25,62.5
  Top 0.2: UC4.23 14.75,55.75 15,56 15,56.25 15.25,56.5 15.75,57 15.75,58.25 v15.5,58.5
  Top 0.3: v19.25,58.5 19.19,58.56 IC7.14
  Bottom 0.15: v19.25,62.5 R87.1
  Bottom 0.2: v19.25,58.5 19,58.75 15.75,58.75 v15.5,58.5
!RESET!  (via drill 0.3)
  Top 0.2: UC1.31 v59,60.25 | JP1.10 64.5,66.31 64.5,63.75 63,62.25 63,61.25 63,60.25 63,60 63,58.75 | 63,58.75 63,58 v63.5,58 | J2.5 62.36,58.75 63,58.75
  Bottom 0.2: v63.5,58 63.1,58 62.5,58.6 R13.1 62,58.85 62,59.25 61.5,59.75 59.5,59.75 v59,60.25
!RESET!1  (via drill 0.3)
  Top 0.2: UC2.31 v60.25,9 | JP4.10 66.31,3.5 63.75,3.5 62.25,5 61.25,5 60.25,5 60,5 58.75,5 | 58.75,5 58,5 v58,4.5 | J1.5 58.75,5.64 58.75,5
  Bottom 0.2: v58,4.5 58,4.9 58.6,5.5 R29.1 58.85,6 59.25,6 59.75,6.5 59.75,8.5 v60.25,9
!RESET!2  (via drill 0.3)
  Top 0.2: UC3.31 v9,7.75 | JP7.10 3.5,1.69 3.5,4.25 5,5.75 5,6.75 5,7.75 5,8 5,9.25 | 5,9.25 5,10 v4.5,10 | J3.5 5.64,9.25 5,9.25
  Bottom 0.2: v4.5,10 4.9,10 5.5,9.4 R57.1 6,9.15 6,8.75 6.5,8.25 8.5,8.25 v9,7.75
!RESET!3  (via drill 0.3)
  Top 0.2: UC4.31 v7.75,59 | JP10.10 1.69,64.5 4.25,64.5 5.75,63 6.75,63 7.75,63 8,63 9.25,63 | 9.25,63 10,63 v10,63.5 | J4.5 9.25,62.36 9.25,63
  Bottom 0.2: v10,63.5 10,63.1 9.4,62.5 R82.1 9.15,62 8.75,62 8.25,61.5 8.25,59.5 v7.75,59
+5V  (via drill 0.3, 0.6)
  Top 0.2: J2.2 59.25,63.14 v59.25,63.25
  Top 0.3: 56.98,43.73 57,43.75 57.02,43.73 | 56.25,46.25 56.23,46.27 IC2.3 57.23,46.27 | 59.25,51 59.25,52.5 59.25,52.75 59.25,53.25 58.75,53.75 v58.25,53.75 57.75,54.25 57,55 53,55 v52.75,55.25 52.55,55.05 UC1.19 | v47.75,39.75 45.75,39.75 44.5,38.5 43,38.5 42.5,38 v42,38 | 56.13,43.75 IC2.5 57.02,43.73 | 57.23,46.27 57.75,45.75 57.75,44 v57.5,43.75 57.48,43.73 57.02,43.73 | v59.5,41.75 59.5,40.75 60,40.25 60.5,40.25 61,39.75 61,37.75 59.41,36.16 JP3.10 | C7.1 59.5,50.75 59.25,51 | v58,47 57.96,47 57.23,46.27 | 59.25,51 C8.1
  Top 0.4: UC1.4 54.15,61.1 v54.5,60.75
  Top 0.8: IC3.3 50.06,48.44 49.5,49 v48.5,49
  Bottom 0.2: v58.25,53.75 58.5,54 59,54.5 59,57.75 59.25,58 60.25,58 61.25,57 62.25,57 | v59.25,63.25 59.5,63.25 60,62.75 60,62.25 60.75,61.5 61,61.5 64.25,58.25 64.25,57.5 63.75,57 62.25,57 | R13.2 62.25,57 | 48.25,49.25 v48.5,49
  Bottom 0.3: JP3.10 59.5,35.94 59.5,39 58.75,39.75 v47.75,39.75 | R2.2 41.25,46.6 41.25,40.25 41.5,40 41.5,38.5 v42,38 | v57.5,43.75 59.25,43.75 59.75,43.25 59.75,42 v59.5,41.75 | v58.25,53.75 58.25,53.25 57.75,52.75 57.75,52 57.75,51.5 57.75,49.5 57.75,49 57.75,47.25 | 57.75,47.25 v58,47 57.75,47.25 | 55,58.75 55,59.6 C10.1
  Bottom 0.4: R2.2 40.6,46.75 40.25,47.1 40.25,50.75 40.75,51.25 R5.2 R10.2 40.5,52.75 40.25,53 40.25,55 40.5,55.25 42.25,55.25 42.75,54.75 42.75,51.75 42.75,50.25 42.75,48 43.25,47.5 45.25,47.5 48,47.5 48.35,47.85 D6.A | v52.75,55.25 52.75,56.75 53.5,57.5 54.5,57.5 54.85,57.85 C6.1 54.85,58.6 55,58.75 | C10.1 54.6,60.65 v54.5,60.75
  Bottom 0.8: D6.A 48.35,48.85 v48.5,49 | C2.1 48,49.5 48.25,49.25
+5V1  (via drill 0.3, 0.6)
  Top 0.2: J1.2 63.14,8.75 v63.25,8.75
  Top 0.3: 43.73,11.02 43.75,11 43.73,10.98 | 46.25,11.75 46.27,11.77 IC1.3 46.27,10.77 | 51,8.75 52.5,8.75 52.75,8.75 53.25,8.75 53.75,9.25 v53.75,9.75 54.25,10.25 55,11 55,15 v55.25,15.25 55.05,15.45 UC2.19 | v39.75,20.25 39.75,22.25 38.5,23.5 38.5,25 38,25.5 v38,26 | 43.75,11.87 IC1.5 43.73,10.98 | 46.27,10.77 45.75,10.25 44,10.25 v43.75,10.5 43.73,10.52 43.73,10.98 | v41.75,8.5 40.75,8.5 40.25,8 40.25,7.5 39.75,7 37.75,7 36.16,8.59 JP5.10 | C15.1 50.75,8.5 51,8.75 | v47,10 47,10.04 46.27,10.77 | 51,8.75 C17.1
  Top 0.4: UC2.4 61.1,13.85 v60.75,13.5
  Top 0.8: IC4.3 48.44,17.94 49,18.5 v49,19.5
  Bottom 0.2: v53.75,9.75 54,9.5 54.5,9 57.75,9 58,8.75 58,7.75 57,6.75 57,5.75 | v63.25,8.75 63.25,8.5 62.75,8 62.25,8 61.5,7.25 61.5,7 58.25,3.75 57.5,3.75 57,4.25 57,5.75 | R29.2 57,5.75 | 49.25,19.75 v49,19.5
  Bottom 0.3: JP5.10 35.94,8.5 39,8.5 39.75,9.25 v39.75,20.25 | R24.2 46.6,26.75 40.25,26.75 40,26.5 38.5,26.5 v38,26 | v43.75,10.5 43.75,8.75 43.25,8.25 42,8.25 v41.75,8.5 | v53.75,9.75 53.25,9.75 52.75,10.25 52,10.25 51.5,10.25 49.5,10.25 49,10.25 47.25,10.25 | 47.25,10.25 v47,10 47.25,10.25 | 58.75,13 59.6,13 C18.1
  Bottom 0.4: R24.2 46.75,27.4 47.1,27.75 50.75,27.75 51.25,27.25 R27.2 R46.2 52.75,27.5 53,27.75 55,27.75 55.25,27.5 55.25,25.75 54.75,25.25 51.75,25.25 50.25,25.25 48,25.25 47.5,24.75 47.5,22.75 47.5,20 47.85,19.65 D11.A | v55.25,15.25 56.75,15.25 57.5,14.5 57.5,13.5 57.85,13.15 C14.1 58.6,13.15 58.75,13 | C18.1 60.65,13.4 v60.75,13.5
  Bottom 0.8: D11.A 48.85,19.65 v49,19.5 | C20.1 49.5,20 49.25,19.75
+5V2  (via drill 0.3, 0.6)
  Top 0.2: J3.2 8.75,4.86 v8.75,4.75
  Top 0.3: 11.02,24.27 11,24.25 10.98,24.27 | 11.75,21.75 11.77,21.73 IC5.3 10.77,21.73 | 8.75,17 8.75,15.5 8.75,15.25 8.75,14.75 9.25,14.25 v9.75,14.25 10.25,13.75 11,13 15,13 v15.25,12.75 15.45,12.95 UC3.19 | v20.25,28.25 22.25,28.25 23.5,29.5 25,29.5 25.5,30 v26,30 | 11.87,24.25 IC5.5 10.98,24.27 | 10.77,21.73 10.25,22.25 10.25,24 v10.5,24.25 10.52,24.27 10.98,24.27 | v8.5,26.25 8.5,27.25 8,27.75 7.5,27.75 7,28.25 7,30.25 8.59,31.84 JP8.10 | C25.1 8.5,17.25 8.75,17 | v10,21 10.04,21 10.77,21.73 | 8.75,17 C27.1
  Top 0.4: UC3.4 13.85,6.9 v13.5,7.25
  Top 0.8: IC6.3 17.94,19.56 18.5,19 v19.5,19
  Bottom 0.2: v9.75,14.25 9.5,14 9,13.5 9,10.25 8.75,10 7.75,10 6.75,11 5.75,11 | v8.75,4.75 8.5,4.75 8,5.25 8,5.75 7.25,6.5 7,6.5 3.75,9.75 3.75,10.5 4.25,11 5.75,11 | R57.2 5.75,11 | 19.75,18.75 v19.5,19
  Bottom 0.3: JP8.10 8.5,32.06 8.5,29 9.25,28.25 v20.25,28.25 | R52.2 26.75,21.4 26.75,27.75 26.5,28 26.5,29.5 v26,30 | v10.5,24.25 8.75,24.25 8.25,24.75 8.25,26 v8.5,26.25 | v9.75,14.25 9.75,14.75 10.25,15.25 10.25,16 10.25,16.5 10.25,18.5 10.25,19 10.25,20.75 | 10.25,20.75 v10,21 10.25,20.75 | 13,9.25 13,8.4 C28.1
  Bottom 0.4: R52.2 27.4,21.25 27.75,20.9 27.75,17.25 27.25,16.75 R55.2 R71.2 27.5,15.25 27.75,15 27.75,13 27.5,12.75 25.75,12.75 25.25,13.25 25.25,16.25 25.25,17.75 25.25,20 24.75,20.5 22.75,20.5 20,20.5 19.65,20.15 D17.A | v15.25,12.75 15.25,11.25 14.5,10.5 13.5,10.5 13.15,10.15 C24.1 13.15,9.4 13,9.25 | C28.1 13.4,7.35 v13.5,7.25
  Bottom 0.8: D17.A 19.65,19.15 v19.5,19 | C30.1 20,18.5 19.75,18.75
+5V3  (via drill 0.3, 0.6)
  Top 0.2: J4.2 4.86,59.25 v4.75,59.25
  Top 0.3: 24.27,56.98 24.25,57 24.27,57.02 | 21.75,56.25 21.73,56.23 IC7.3 21.73,57.23 | 17,59.25 15.5,59.25 15.25,59.25 14.75,59.25 14.25,58.75 v14.25,58.25 13.75,57.75 13,57 13,53 v12.75,52.75 12.95,52.55 UC4.19 | v28.25,47.75 28.25,45.75 29.5,44.5 29.5,43 30,42.5 v30,42 | 24.25,56.13 IC7.5 24.27,57.02 | 21.73,57.23 22.25,57.75 24,57.75 v24.25,57.5 24.27,57.48 24.27,57.02 | v26.25,59.5 27.25,59.5 27.75,60 27.75,60.5 28.25,61 30.25,61 31.84,59.41 JP11.10 | C35.1 17.25,59.5 17,59.25 | v21,58 21,57.96 21.73,57.23 | 17,59.25 C37.1
  Top 0.4: UC4.4 6.9,54.15 v7.25,54.5
  Top 0.8: IC8.3 19.56,50.06 19,49.5 v19,48.5
  Bottom 0.2: v14.25,58.25 14,58.5 13.5,59 10.25,59 10,59.25 10,60.25 11,61.25 11,62.25 | v4.75,59.25 4.75,59.5 5.25,60 5.75,60 6.5,60.75 6.5,61 9.75,64.25 10.5,64.25 11,63.75 11,62.25 | R82.2 11,62.25 | 18.75,48.25 v19,48.5
  Bottom 0.3: JP11.10 32.06,59.5 29,59.5 28.25,58.75 v28.25,47.75 | R77.2 21.4,41.25 27.75,41.25 28,41.5 29.5,41.5 v30,42 | v24.25,57.5 24.25,59.25 24.75,59.75 26,59.75 v26.25,59.5 | v14.25,58.25 14.75,58.25 15.25,57.75 16,57.75 16.5,57.75 18.5,57.75 19,57.75 20.75,57.75 | 20.75,57.75 v21,58 20.75,57.75 | 9.25,55 8.4,55 C38.1
  Bottom 0.4: R77.2 21.25,40.6 20.9,40.25 17.25,40.25 16.75,40.75 R80.2 R96.2 15.25,40.5 15,40.25 13,40.25 12.75,40.5 12.75,42.25 13.25,42.75 16.25,42.75 17.75,42.75 20,42.75 20.5,43.25 20.5,45.25 20.5,48 20.15,48.35 D23.A | v12.75,52.75 11.25,52.75 10.5,53.5 10.5,54.5 10.15,54.85 C34.1 9.4,54.85 9.25,55 | C38.1 7.35,54.6 v7.25,54.5
  Bottom 0.8: D23.A 19.15,48.35 v19,48.5 | C40.1 18.5,48 18.75,48.25
AREF
  Top 0.3: UC1.21 54.15,53.1 54.75,52.5 55,52.25 C5.1
AREF1
  Top 0.3: UC2.21 53.1,13.85 52.5,13.25 52.25,13 C13.1
AREF2
  Top 0.3: UC3.21 13.85,14.9 13.25,15.5 13,15.75 C23.1
AREF3
  Top 0.3: UC4.21 14.9,54.15 15.5,54.75 15.75,55 C33.1
CAN_EN  (via drill 0.3)
  Top 0.2: R19.1 51,40.85 51,40.5 51.5,40 52.75,40 53,40 53.25,40.25 53.25,41.75 53.5,42 54,42 v54.5,42.5 54.75,42.25 55.94,42.25 IC2.6 56.19,42.5 | UC1.24 56.55,53.7 v56.75,53.5
  Bottom 0.2: v54.5,42.5 56.25,44.25 56.25,48 56.5,48.25 56.75,48.5 56.75,49.5 56.75,50 56.75,51 56.75,51.5 v56.75,53.5
CAN_EN1  (via drill 0.3)
  Top 0.2: R38.1 40.85,17 40.5,17 40,16.5 40,15.25 40,15 40.25,14.75 41.75,14.75 42,14.5 42,14 v42.5,13.5 42.25,13.25 42.25,12.06 IC1.6 42.5,11.81 | UC2.24 53.7,11.45 v53.5,11.25
  Bottom 0.2: v42.5,13.5 44.25,11.75 48,11.75 48.25,11.5 48.5,11.25 49.5,11.25 50,11.25 51,11.25 51.5,11.25 v53.5,11.25
CAN_EN2  (via drill 0.3)
  Top 0.2: R63.1 17,27.15 17,27.5 16.5,28 15.25,28 15,28 14.75,27.75 14.75,26.25 14.5,26 14,26 v13.5,25.5 13.25,25.75 12.06,25.75 IC5.6 11.81,25.5 | UC3.24 11.45,14.3 v11.25,14.5
  Bottom 0.2: v13.5,25.5 11.75,23.75 11.75,20 11.5,19.75 11.25,19.5 11.25,18.5 11.25,18 11.25,17 11.25,16.5 v11.25,14.5
CAN_EN3  (via drill 0.3)
  Top 0.2: R88.1 27.15,51 27.5,51 28,51.5 28,52.75 28,53 27.75,53.25 26.25,53.25 26,53.5 26,54 v25.5,54.5 25.75,54.75 25.75,55.94 IC7.6 25.5,56.19 | UC4.24 14.3,56.55 v14.5,56.75
  Bottom 0.2: v25.5,54.5 23.75,56.25 20,56.25 19.75,56.5 19.5,56.75 18.5,56.75 18,56.75 17,56.75 16.5,56.75 v14.5,56.75
CAN_RX  (via drill 0.3)
  Top 0.2: UC1.7 51.75,60.75 53.25,59.25 54.25,59.25 54.75,58.75 54.75,57 v54.5,56.75 | IC2.4 v55,45
  Bottom 0.2: v55,45 55,47.5 54.25,48.25 54.25,49 54.5,49.25 54.75,49.25 55,49.5 55.25,49.75 55.25,50.25 55.25,50.5 55.25,50.75 55.25,52.25 54.5,53 v54.5,56.75
CAN_RX1  (via drill 0.3)
  Top 0.2: UC2.7 60.75,16.25 59.25,14.75 59.25,13.75 58.75,13.25 57,13.25 v56.75,13.5 | IC1.4 v45,13
  Bottom 0.2: v45,13 47.5,13 48.25,13.75 49,13.75 49.25,13.5 49.25,13.25 49.5,13 49.75,12.75 50.25,12.75 50.5,12.75 50.75,12.75 52.25,12.75 53,13.5 v56.75,13.5
CAN_RX2  (via drill 0.3)
  Top 0.2: UC3.7 16.25,7.25 14.75,8.75 13.75,8.75 13.25,9.25 13.25,11 v13.5,11.25 | IC5.4 v13,23
  Bottom 0.2: v13,23 13,20.5 13.75,19.75 13.75,19 13.5,18.75 13.25,18.75 13,18.5 12.75,18.25 12.75,17.75 12.75,17.5 12.75,17.25 12.75,15.75 13.5,15 v13.5,11.25
CAN_RX3  (via drill 0.3)
  Top 0.2: UC4.7 7.25,51.75 8.75,53.25 8.75,54.25 9.25,54.75 11,54.75 v11.25,54.5 | IC7.4 v23,55
  Bottom 0.2: v23,55 20.5,55 19.75,54.25 19,54.25 18.75,54.5 18.75,54.75 18.5,55 18.25,55.25 17.75,55.25 17.5,55.25 17.25,55.25 15.75,55.25 15,54.5 v11.25,54.5
CAN_TX  (via drill 0.3)
  Top 0.2: UC1.6 52.5,62.49 52.5,60.75 53.5,59.75 54.75,59.75 55.25,59.25 55.25,57 v55.5,56.75 | IC2.1 55.31,48.81 v55,48.5
  Bottom 0.2: v55,48.5 55,48.75 55.75,49.5 55.75,50 55.75,50.5 55.75,51 55.75,52.5 55.25,53 55.25,56.5 v55.5,56.75
CAN_TX1  (via drill 0.3)
  Top 0.2: UC2.6 62.49,15.5 60.75,15.5 59.75,14.5 59.75,13.25 59.25,12.75 57,12.75 v56.75,12.5 | IC1.1 48.81,12.69 v48.5,13
  Bottom 0.2: v48.5,13 48.75,13 49.5,12.25 50,12.25 50.5,12.25 51,12.25 52.5,12.25 53,12.75 56.5,12.75 v56.75,12.5
CAN_TX2  (via drill 0.3)
  Top 0.2: UC3.6 15.5,5.51 15.5,7.25 14.5,8.25 13.25,8.25 12.75,8.75 12.75,11 v12.5,11.25 | IC5.1 12.69,19.19 v13,19.5
  Bottom 0.2: v13,19.5 13,19.25 12.25,18.5 12.25,18 12.25,17.5 12.25,17 12.25,15.5 12.75,15 12.75,11.5 v12.5,11.25
CAN_TX3  (via drill 0.3)
  Top 0.2: UC4.6 5.51,52.5 7.25,52.5 8.25,53.5 8.25,54.75 8.75,55.25 11,55.25 v11.25,55.5 | IC7.1 19.19,55.31 v19.5,55
  Bottom 0.2: v19.5,55 19.25,55 18.5,55.75 18,55.75 17.5,55.75 17,55.75 15.5,55.75 15,55.25 11.5,55.25 v11.25,55.5
CANH  (via drill 0.3)
  Top 0.15: IC2.13 61.39,47.5
  Top 0.2: IC2.13 61.31,47.5 v60,47.5 59.75,47.5 59.5,47.25 58.25,46 58.25,44.5 58.25,44.25 58.25,43.75 58.25,43.5 57.75,43 57.75,42.25 57.75,40.75 57.5,40.5 56.25,40.5 52.75,37 52.25,37 51.75,36.5 51.75,35.88 JP3.7 | R14.2 61.85,54.27 | R14.2 61.85,54.35 | v61,53.25 61.5,53.25 61.85,53.6 R14.2 | 61.39,47.5 62.5,47.5 v62.75,47.75
  Bottom 0.2: v60,47.5 60.25,47.75 60.25,52 60.25,52.25 60.5,52.5 61,53 v61,53.25 | X2.8 64.63,49.63 64.5,49.5 63.75,48.75 63.5,48.5 63.5,48.25 63.25,48 63,48 v62.75,47.75
CANH1  (via drill 0.3)
  Top 0.15: IC1.13 47.5,6.61
  Top 0.2: IC1.13 47.5,6.69 v47.5,8 47.5,8.25 47.25,8.5 46,9.75 44.5,9.75 44.25,9.75 43.75,9.75 43.5,9.75 43,10.25 42.25,10.25 40.75,10.25 40.5,10.5 40.5,11.75 37,15.25 37,15.75 36.5,16.25 35.88,16.25 JP5.7 | R33.2 54.27,6.15 | R33.2 54.35,6.15 | v53.25,7 53.25,6.5 53.6,6.15 R33.2 | 47.5,6.61 47.5,5.5 v47.75,5.25
  Bottom 0.2: v47.5,8 47.75,7.75 52,7.75 52.25,7.75 52.5,7.5 53,7 v53.25,7 | X4.8 49.63,3.37 49.5,3.5 48.75,4.25 48.5,4.5 48.25,4.5 48,4.75 48,5 v47.75,5.25
CANH2  (via drill 0.3)
  Top 0.15: IC5.13 6.61,20.5
  Top 0.2: IC5.13 6.69,20.5 v8,20.5 8.25,20.5 8.5,20.75 9.75,22 9.75,23.5 9.75,23.75 9.75,24.25 9.75,24.5 10.25,25 10.25,25.75 10.25,27.25 10.5,27.5 11.75,27.5 15.25,31 15.75,31 16.25,31.5 16.25,32.12 JP8.7 | R58.2 6.15,13.73 | R58.2 6.15,13.65 | v7,14.75 6.5,14.75 6.15,14.4 R58.2 | 6.61,20.5 5.5,20.5 v5.25,20.25
  Bottom 0.2: v8,20.5 7.75,20.25 7.75,16 7.75,15.75 7.5,15.5 7,15 v7,14.75 | X6.8 3.37,18.37 3.5,18.5 4.25,19.25 4.5,19.5 4.5,19.75 4.75,20 5,20 v5.25,20.25
CANH3  (via drill 0.3)
  Top 0.15: IC7.13 20.5,61.39
  Top 0.2: IC7.13 20.5,61.31 v20.5,60 20.5,59.75 20.75,59.5 22,58.25 23.5,58.25 23.75,58.25 24.25,58.25 24.5,58.25 25,57.75 25.75,57.75 27.25,57.75 27.5,57.5 27.5,56.25 31,52.75 31,52.25 31.5,51.75 32.12,51.75 JP11.7 | R83.2 13.73,61.85 | R83.2 13.65,61.85 | v14.75,61 14.75,61.5 14.4,61.85 R83.2 | 20.5,61.39 20.5,62.5 v20.25,62.75
  Bottom 0.2: v20.5,60 20.25,60.25 16,60.25 15.75,60.25 15.5,60.5 15,61 v14.75,61 | X8.8 18.37,64.63 18.5,64.5 19.25,63.75 19.5,63.5 19.75,63.5 20,63.25 20,63 v20.25,62.75
CANL  (via drill 0.3)
  Top 0.15: 64.75,48 X2.4
  Top 0.2: R15.2 62.1,55.75 62.5,55.75 v62.75,55.5 | JP3.8 54.25,35.92 54.25,37.75 55.75,39.25 56.5,40 56.79,40 57.02,40 57.75,40 58.25,40.5 58.25,41.75 58.25,42.75 58.75,43.25 58.75,44 58.75,44.5 58.75,45.75 59.25,46.25 v60,46.25 61.33,46.25 IC2.12 62.52,46.27 64.25,48 64.51,48.26 X2.4
  Bottom 0.2: v60,46.25 60.25,46.25 60.75,46.75 60.75,52 61.5,52.75 62.25,53.5 62.25,54.75 62.75,55.25 v62.75,55.5
CANL1  (via drill 0.3)
  Top 0.15: 48,3.25 X4.4
  Top 0.2: R34.2 55.75,5.9 55.75,5.5 v55.5,5.25 | JP5.8 35.92,13.75 37.75,13.75 39.25,12.25 40,11.5 40,11.21 40,10.98 40,10.25 40.5,9.75 41.75,9.75 42.75,9.75 43.25,9.25 44,9.25 44.5,9.25 45.75,9.25 46.25,8.75 v46.25,8 46.25,6.67 IC1.12 46.27,5.48 48,3.75 48.26,3.49 X4.4
  Bottom 0.2: v46.25,8 46.25,7.75 46.75,7.25 52,7.25 52.75,6.5 53.5,5.75 54.75,5.75 55.25,5.25 v55.5,5.25
CANL2  (via drill 0.3)
  Top 0.15: 3.25,20 X6.4
  Top 0.2: R59.2 5.9,12.25 5.5,12.25 v5.25,12.5 | JP8.8 13.75,32.08 13.75,30.25 12.25,28.75 11.5,28 11.21,28 10.98,28 10.25,28 9.75,27.5 9.75,26.25 9.75,25.25 9.25,24.75 9.25,24 9.25,23.5 9.25,22.25 8.75,21.75 v8,21.75 6.67,21.75 IC5.12 5.48,21.73 3.75,20 3.49,19.74 X6.4
  Bottom 0.2: v8,21.75 7.75,21.75 7.25,21.25 7.25,16 6.5,15.25 5.75,14.5 5.75,13.25 5.25,12.75 v5.25,12.5
CANL3  (via drill 0.3)
  Top 0.15: 20,64.75 X8.4
  Top 0.2: R84.2 12.25,62.1 12.25,62.5 v12.5,62.75 | JP11.8 32.08,54.25 30.25,54.25 28.75,55.75 28,56.5 28,56.79 28,57.02 28,57.75 27.5,58.25 26.25,58.25 25.25,58.25 24.75,58.75 24,58.75 23.5,58.75 22.25,58.75 21.75,59.25 v21.75,60 21.75,61.33 IC7.12 21.73,62.52 20,64.25 19.74,64.51 X8.4
  Bottom 0.2: v21.75,60 21.75,60.25 21.25,60.75 16,60.75 15.25,61.5 14.5,62.25 13.25,62.25 12.75,62.75 v12.5,62.75
D2A  (via drill 0.3)
  Top 0.2: v58.25,55.25 v58.25,55.24 UC1.25
  Bottom 0.2: JP3.4 44.25,35.92 44.25,36 44.75,36.5 44.75,37.75 44.25,38.25 44.25,39.75 45.5,41 45.75,41.25 46,41.25 46.75,42 47.5,42 49.75,42 50.75,43 50.75,45.25 51.25,45.75 52,45.75 53,44.75 53.5,44.25 53.5,43.5 53.5,42 53.75,41.75 56.25,41.75 56.75,42.25 56.75,44.25 56.75,47.75 57,48 57.25,48.25 57.25,49.25 57.25,49.75 57.25,51.25 57.25,51.75 57.25,52 57.25,53 57.5,53.25 57.5,53.75 57.25,54 57.25,55 57.5,55.25 v58.25,55.25
D2A1  (via drill 0.3)
  Top 0.2: v55.25,9.75 v55.24,9.75 UC2.25
  Bottom 0.2: JP5.4 35.92,23.75 36,23.75 36.5,23.25 37.75,23.25 38.25,23.75 39.75,23.75 41,22.5 41.25,22.25 41.25,22 42,21.25 42,20.5 42,18.25 43,17.25 45.25,17.25 45.75,16.75 45.75,16 44.75,15 44.25,14.5 43.5,14.5 42,14.5 41.75,14.25 41.75,11.75 42.25,11.25 44.25,11.25 47.75,11.25 48,11 48.25,10.75 49.25,10.75 49.75,10.75 51.25,10.75 51.75,10.75 52,10.75 53,10.75 53.25,10.5 53.75,10.5 54,10.75 55,10.75 55.25,10.5 v55.25,9.75
D2A2  (via drill 0.3)
  Top 0.2: v9.75,12.75 v9.75,12.76 UC3.25
  Bottom 0.2: JP8.4 23.75,32.08 23.75,32 23.25,31.5 23.25,30.25 23.75,29.75 23.75,28.25 22.5,27 22.25,26.75 22,26.75 21.25,26 20.5,26 18.25,26 17.25,25 17.25,22.75 16.75,22.25 16,22.25 15,23.25 14.5,23.75 14.5,24.5 14.5,26 14.25,26.25 11.75,26.25 11.25,25.75 11.25,23.75 11.25,20.25 11,20 10.75,19.75 10.75,18.75 10.75,18.25 10.75,16.75 10.75,16.25 10.75,16 10.75,15 10.5,14.75 10.5,14.25 10.75,14 10.75,13 10.5,12.75 v9.75,12.75
D2A3  (via drill 0.3)
  Top 0.2: v12.75,58.25 v12.76,58.25 UC4.25
  Bottom 0.2: JP11.4 32.08,44.25 32,44.25 31.5,44.75 30.25,44.75 29.75,44.25 28.25,44.25 27,45.5 26.75,45.75 26.75,46 26,46.75 26,47.5 26,49.75 25,50.75 22.75,50.75 22.25,51.25 22.25,52 23.25,53 23.75,53.5 24.5,53.5 26,53.5 26.25,53.75 26.25,56.25 25.75,56.75 23.75,56.75 20.25,56.75 20,57 19.75,57.25 18.75,57.25 18.25,57.25 16.75,57.25 16.25,57.25 16,57.25 15,57.25 14.75,57.5 14.25,57.5 14,57.25 13,57.25 12.75,57.5 v12.75,58.25
GND  (via drill 0.3, 0.6)
  Top 0.2: C8.2 56.8,50.45 | R19.2 49.15,41.9 49.5,42.25 51,42.25 51.75,43 51.75,44 52.25,44.5 52.65,44.5 Q5.2 | 52.7,44.7 Q5.2 | D2.A 43.85,56.4 D2.A | C4.2 43.95,56 D2.A | J2.6 62.41,62.66 v63,63.25 | C1.2 43.9,63.4 43.75,63.25 | 51.65,46.1 52.5,45.25 52.5,45.05 Q5.2 | R17.2 51.65,46.9 51.65,47.4 51.75,47.5 | LED2.C 51.75,47.5 | 51.75,47.5 51,48.25 50.75,48.5 50.75,49.5 50.75,49.75 | 53.35,49.85 53.25,49.75
  Top 0.3: UC1.5 53.35,62.43 | 53.35,62.43 53.35,61.35 v53.25,61.25 | 61.85,50.4 C7.2 | UC1.20 53.35,53.1 v53.25,53 | Q5.2 52.75,44.8 52.75,45 | R17.2 51.65,46.1 | 53.35,62.43 53.35,63.6 v53.5,63.75 | IC2.2 57.04,47.54 57.5,48 57.75,48.25 57.75,49.25 57.75,49.75 | 53.35,49.85 R21.2 53.35,51.4 v52.75,52
  Top 0.4: Q1.2 43.15,46.95 R1.1 43.85,46.85 44.25,47.25 44.25,48 45,48.75 45,49.75 45.5,50.25 47,50.25 | 40.5,50.25 40.7,50.45 Q2.2 41.7,50.35 R4.1 | 40.5,50.25 40.5,53.25 41.2,53.95 Q3.2 43.15,53.95 43.7,54.5 D2.A | LED3.C 39.25,44.25 39.75,44.75 40,44.75 40.5,45.25 40.5,45.85 40.5,46.95 | 43.85,56.4 R31.1 R32.1 43.85,61.1 43.85,61.35 D3.A 43.9,61.7 43.9,61.95 C1.2 v42.5,63.5 | R9.1 46.15,53.85 v46.25,53.75 v47.25,53.75 | v49.25,53.75 v48.25,53.75 v47.25,53.75 | v47.25,53.75 47.25,53.6 IC3.4 48.1,52.75 v48.25,52.75 | 47,52.5 46.65,52.5 | 46.65,52.5 C3.2 46.65,52.5 | 46.85,52.35 v47.25,52.75 | 40.5,50.25 40.5,47
  Top 0.6: C8.2 56.8,50.2 57.12,49.88 | C9.2 C7.2 62.1,51 62.75,51 | 61.85,50.4 61.85,50.1 61.5,49.75 58,49.75 57.75,49.75 57.25,49.75 | 40.5,47 40.55,46.95 40.5,46.95 | 57.25,49.75 57.12,49.88 | 57,50 57.12,49.88 | 62.75,51 X2.3 | v62.75,50.5 62.75,51 | 57.25,49.75 55.4,49.75 C5.2 54.6,49.75 53.25,49.75 50.75,49.75 50.25,50.25 47,50.25
  Top 0.8: 43.15,53.95 R9.1 | 47,52.5 v47.25,52.75 47.6,53.1 IC3.4 | 40.5,47 39.75,47.75 38.5,47.75 38,47.25 38,46.5 37.51,46.01 JP2.6 | 40.5,46.95 Q1.2
  Top 1: 47,52.5 47,50.5 47,50.25 47,47.65 IC3.2
  Bottom 0.2: v63,63.25 63,63.75
  Bottom 0.3: v53.25,61.25 53,61.25 | v53.5,63.75 54,63.75 | v52.75,52 52.75,52.5 | 52.75,52.5 v53.25,53 | 52.75,52.5 52.25,52.5
  Bottom 0.4: v42.5,63.5 42.5,64 | C10.2 52.9,58.75 C6.2
  Bottom 0.6: R18.2 62.6,50.5 v62.75,50.5
  Bottom 0.8: C2.2 48,52.5 v48.25,52.75
  other vias: 49.25,52.75 46.25,52.75
  pour Bottom (isolate 0.15): 67.75,67.75 67.75,34.25 34.25,34.25 34.25,67.75
GND1  (via drill 0.3, 0.6)
  Top 0.2: C17.2 50.45,11.2 | R38.2 41.9,18.85 42.25,18.5 42.25,17 43,16.25 44,16.25 44.5,15.75 44.5,15.35 Q8.2 | 44.7,15.3 Q8.2 | D8.A 56.4,24.15 D8.A | C12.2 56,24.05 D8.A | J1.6 62.66,5.59 v63.25,5 | C11.2 63.4,24.1 63.25,24.25 | 46.1,16.35 45.25,15.5 45.05,15.5 Q8.2 | R36.2 46.9,16.35 47.4,16.35 47.5,16.25 | LED4.C 47.5,16.25 | 47.5,16.25 48.25,17 48.5,17.25 49.5,17.25 49.75,17.25 | 49.85,14.65 49.75,14.75
  Top 0.3: UC2.5 62.43,14.65 | 62.43,14.65 61.35,14.65 v61.25,14.75 | 50.4,6.15 C15.2 | UC2.20 53.1,14.65 v53,14.75 | Q8.2 44.8,15.25 45,15.25 | R36.2 46.1,16.35 | 62.43,14.65 63.6,14.65 v63.75,14.5 | IC1.2 47.54,10.96 48,10.5 48.25,10.25 49.25,10.25 49.75,10.25 | 49.85,14.65 R50.2 51.4,14.65 v52,15.25
  Top 0.4: Q6.2 46.95,24.85 R23.1 46.85,24.15 47.25,23.75 48,23.75 48.75,23 49.75,23 50.25,22.5 50.25,21 | 50.25,27.5 50.45,27.3 Q7.2 50.35,26.3 R26.1 | 50.25,27.5 53.25,27.5 53.95,26.8 Q9.2 53.95,24.85 54.5,24.3 D8.A | LED5.C 44.25,28.75 44.75,28.25 44.75,28 45.25,27.5 45.85,27.5 46.95,27.5 | 56.4,24.15 R42.1 R43.1 61.1,24.15 61.35,24.15 D9.A 61.7,24.1 61.95,24.1 C11.2 v63.5,25.5 | R45.1 53.85,21.85 v53.75,21.75 v53.75,20.75 | v53.75,18.75 v53.75,19.75 v53.75,20.75 | v53.75,20.75 53.6,20.75 IC4.4 52.75,19.9 v52.75,19.75 | 52.5,21 52.5,21.35 | 52.5,21.35 C19.2 52.5,21.35 | 52.35,21.15 v52.75,20.75 | 50.25,27.5 47,27.5
  Top 0.6: C17.2 50.2,11.2 49.88,10.88 | C16.2 C15.2 51,5.9 51,5.25 | 50.4,6.15 50.1,6.15 49.75,6.5 49.75,10 49.75,10.25 49.75,10.75 | 47,27.5 46.95,27.45 46.95,27.5 | 49.75,10.75 49.88,10.88 | 50,11 49.88,10.88 | 51,5.25 X4.3 | v50.5,5.25 51,5.25 | 49.75,10.75 49.75,12.6 C13.2 49.75,13.4 49.75,14.75 49.75,17.25 50.25,17.75 50.25,21
  Top 0.8: 53.95,24.85 R45.1 | 52.5,21 v52.75,20.75 53.1,20.4 IC4.4 | 47,27.5 47.75,28.25 47.75,29.5 47.25,30 46.5,30 46.01,30.5 JP6.6 | 46.95,27.5 Q6.2
  Top 1: 52.5,21 50.5,21 50.25,21 47.65,21 IC4.2
  Bottom 0.2: v63.25,5 63.75,5
  Bottom 0.3: v61.25,14.75 61.25,15 | v63.75,14.5 63.75,14 | v52,15.25 52.5,15.25 | 52.5,15.25 v53,14.75 | 52.5,15.25 52.5,15.75
  Bottom 0.4: v63.5,25.5 64,25.5 | C18.2 58.75,15.1 C14.2
  Bottom 0.6: R37.2 50.5,5.4 v50.5,5.25
  Bottom 0.8: C20.2 52.5,20 v52.75,19.75
  other vias: 52.75,18.75 52.75,21.75
  pour Bottom (isolate 0.15): 67.75,0.25 34.25,0.25 34.25,33.75 67.75,33.75
GND2  (via drill 0.3, 0.6)
  Top 0.2: C27.2 11.2,17.55 | R63.2 18.85,26.1 18.5,25.75 17,25.75 16.25,25 16.25,24 15.75,23.5 15.35,23.5 Q13.2 | 15.3,23.3 Q13.2 | D14.A 24.15,11.6 D14.A | C22.2 24.05,12 D14.A | J3.6 5.59,5.34 v5,4.75 | C21.2 24.1,4.6 24.25,4.75 | 16.35,21.9 15.5,22.75 15.5,22.95 Q13.2 | R61.2 16.35,21.1 16.35,20.6 16.25,20.5 | LED7.C 16.25,20.5 | 16.25,20.5 17,19.75 17.25,19.5 17.25,18.5 17.25,18.25 | 14.65,18.15 14.75,18.25
  Top 0.3: UC3.5 14.65,5.57 | 14.65,5.57 14.65,6.65 v14.75,6.75 | 6.15,17.6 C25.2 | UC3.20 14.65,14.9 v14.75,15 | Q13.2 15.25,23.2 15.25,23 | R61.2 16.35,21.9 | 14.65,5.57 14.65,4.4 v14.5,4.25 | IC5.2 10.96,20.46 10.5,20 10.25,19.75 10.25,18.75 10.25,18.25 | 14.65,18.15 R75.2 14.65,16.6 v15.25,16
  Top 0.4: Q11.2 24.85,21.05 R51.1 24.15,21.15 23.75,20.75 23.75,20 23,19.25 23,18.25 22.5,17.75 21,17.75 | 27.5,17.75 27.3,17.55 Q12.2 26.3,17.65 R54.1 | 27.5,17.75 27.5,14.75 26.8,14.05 Q14.2 24.85,14.05 24.3,13.5 D14.A | LED8.C 28.75,23.75 28.25,23.25 28,23.25 27.5,22.75 27.5,22.15 27.5,21.05 | 24.15,11.6 R67.1 R68.1 24.15,6.9 24.15,6.65 D15.A 24.1,6.3 24.1,6.05 C21.2 v25.5,4.5 | R70.1 21.85,14.15 v21.75,14.25 v20.75,14.25 | v18.75,14.25 v19.75,14.25 v20.75,14.25 | v20.75,14.25 20.75,14.4 IC6.4 19.9,15.25 v19.75,15.25 | 21,15.5 21.35,15.5 | 21.35,15.5 C29.2 21.35,15.5 | 21.15,15.65 v20.75,15.25 | 27.5,17.75 27.5,21
  Top 0.6: C27.2 11.2,17.8 10.88,18.12 | C26.2 C25.2 5.9,17 5.25,17 | 6.15,17.6 6.15,17.9 6.5,18.25 10,18.25 10.25,18.25 10.75,18.25 | 27.5,21 27.45,21.05 27.5,21.05 | 10.75,18.25 10.88,18.12 | 11,18 10.88,18.12 | 5.25,17 X6.3 | v5.25,17.5 5.25,17 | 10.75,18.25 12.6,18.25 C23.2 13.4,18.25 14.75,18.25 17.25,18.25 17.75,17.75 21,17.75
  Top 0.8: 24.85,14.05 R70.1 | 21,15.5 v20.75,15.25 20.4,14.9 IC6.4 | 27.5,21 28.25,20.25 29.5,20.25 30,20.75 30,21.5 30.5,21.99 JP9.6 | 27.5,21.05 Q11.2
  Top 1: 21,15.5 21,17.5 21,17.75 21,20.35 IC6.2
  Bottom 0.2: v5,4.75 5,4.25
  Bottom 0.3: v14.75,6.75 15,6.75 | v14.5,4.25 14,4.25 | v15.25,16 15.25,15.5 | 15.25,15.5 v14.75,15 | 15.25,15.5 15.75,15.5
  Bottom 0.4: v25.5,4.5 25.5,4 | C28.2 15.1,9.25 C24.2
  Bottom 0.6: R62.2 5.4,17.5 v5.25,17.5
  Bottom 0.8: C30.2 20,15.5 v19.75,15.25
  other vias: 18.75,15.25 21.75,15.25
  pour Bottom (isolate 0.15): 0.25,0.25 0.25,33.75 33.75,33.75 33.75,0.25
GND3  (via drill 0.3, 0.6)
  Top 0.2: C37.2 17.55,56.8 | R88.2 26.1,49.15 25.75,49.5 25.75,51 25,51.75 24,51.75 23.5,52.25 23.5,52.65 Q18.2 | 23.3,52.7 Q18.2 | D20.A 11.6,43.85 D20.A | C32.2 12,43.95 D20.A | J4.6 5.34,62.41 v4.75,63 | C31.2 4.6,43.9 4.75,43.75 | 21.9,51.65 22.75,52.5 22.95,52.5 Q18.2 | R86.2 21.1,51.65 20.6,51.65 20.5,51.75 | LED10.C 20.5,51.75 | 20.5,51.75 19.75,51 19.5,50.75 18.5,50.75 18.25,50.75 | 18.15,53.35 18.25,53.25
  Top 0.3: UC4.5 5.57,53.35 | 5.57,53.35 6.65,53.35 v6.75,53.25 | 17.6,61.85 C35.2 | UC4.20 14.9,53.35 v15,53.25 | Q18.2 23.2,52.75 23,52.75 | R86.2 21.9,51.65 | 5.57,53.35 4.4,53.35 v4.25,53.5 | IC7.2 20.46,57.04 20,57.5 19.75,57.75 18.75,57.75 18.25,57.75 | 18.15,53.35 R100.2 16.6,53.35 v16,52.75
  Top 0.4: Q16.2 21.05,43.15 R76.1 21.15,43.85 20.75,44.25 20,44.25 19.25,45 18.25,45 17.75,45.5 17.75,47 | 17.75,40.5 17.55,40.7 Q17.2 17.65,41.7 R79.1 | 17.75,40.5 14.75,40.5 14.05,41.2 Q19.2 14.05,43.15 13.5,43.7 D20.A | LED11.C 23.75,39.25 23.25,39.75 23.25,40 22.75,40.5 22.15,40.5 21.05,40.5 | 11.6,43.85 R92.1 R93.1 6.9,43.85 6.65,43.85 D21.A 6.3,43.9 6.05,43.9 C31.2 v4.5,42.5 | R95.1 14.15,46.15 v14.25,46.25 v14.25,47.25 | v14.25,49.25 v14.25,48.25 v14.25,47.25 | v14.25,47.25 14.4,47.25 IC8.4 15.25,48.1 v15.25,48.25 | 15.5,47 15.5,46.65 | 15.5,46.65 C39.2 15.5,46.65 | 15.65,46.85 v15.25,47.25 | 17.75,40.5 21,40.5
  Top 0.6: C37.2 17.8,56.8 18.12,57.12 | C36.2 C35.2 17,62.1 17,62.75 | 17.6,61.85 17.9,61.85 18.25,61.5 18.25,58 18.25,57.75 18.25,57.25 | 21,40.5 21.05,40.55 21.05,40.5 | 18.25,57.25 18.12,57.12 | 18,57 18.12,57.12 | 17,62.75 X8.3 | v17.5,62.75 17,62.75 | 18.25,57.25 18.25,55.4 C33.2 18.25,54.6 18.25,53.25 18.25,50.75 17.75,50.25 17.75,47
  Top 0.8: 14.05,43.15 R95.1 | 15.5,47 v15.25,47.25 14.9,47.6 IC8.4 | 21,40.5 20.25,39.75 20.25,38.5 20.75,38 21.5,38 21.99,37.51 JP12.6 | 21.05,40.5 Q16.2
  Top 1: 15.5,47 17.5,47 17.75,47 20.35,47 IC8.2
  Bottom 0.2: v4.75,63 4.25,63
  Bottom 0.3: v6.75,53.25 6.75,53 | v4.25,53.5 4.25,54 | v16,52.75 15.5,52.75 | 15.5,52.75 v15,53.25 | 15.5,52.75 15.5,52.25
  Bottom 0.4: v4.5,42.5 4,42.5 | C38.2 9.25,52.9 C34.2
  Bottom 0.6: R87.2 17.5,62.6 v17.5,62.75
  Bottom 0.8: C40.2 15.5,48 v15.25,48.25
  other vias: 15.25,49.25 15.25,46.25
  pour Bottom (isolate 0.15): 0.25,67.75 33.75,67.75 33.75,34.25 0.25,34.25
IN0
  Top 0.4: R12.2 38.75,58 38.5,57.75 38.5,56.75 38,56.25 36.63,56.25 JP2.2
IN1
  Top 0.4: R30.2 38.75,59.5 38.5,59.25 37.09,59.25 JP2.1
IN2
  Top 0.4: R41.2 59.5,29.25 59.25,29.5 59.25,30.91 JP6.1
IN3
  Top 0.4: R40.2 58,29.25 57.75,29.5 56.75,29.5 56.25,30 56.25,31.37 JP6.2
IN4
  Top 0.4: R66.2 29.25,8.5 29.5,8.75 30.91,8.75 JP9.1
IN5
  Top 0.4: R65.2 29.25,10 29.5,10.25 29.5,11.25 30,11.75 31.37,11.75 JP9.2
IN6
  Top 0.4: R91.2 8.5,38.75 8.75,38.5 8.75,37.09 JP12.1
IN7
  Top 0.4: R90.2 10,38.75 10.25,38.5 11.25,38.5 11.75,38 11.75,36.63 JP12.2
INH
  Top 0.2: R17.1 54,45.6 54,43.25 53.55,42.8 Q5.1 52.4,42.35 R20.2
INH1
  Top 0.2: R36.1 45.6,14 43.25,14 42.8,14.45 Q8.1 42.35,15.6 R39.2
INH2
  Top 0.2: R61.1 14,22.4 14,24.75 14.45,25.2 Q13.1 15.6,25.65 R64.2
INH3